# Altium PCB 光纖發射.PCBDOC
Units mm, origin at the board's own origin, x right, y up, seen from the top; angles counter-clockwise.
Board outline 152.4 x 101.6 mm, 2 copper layers (Top Layer, Bottom Layer); 21 components, 17 nets, 71 pads, 2 vias.
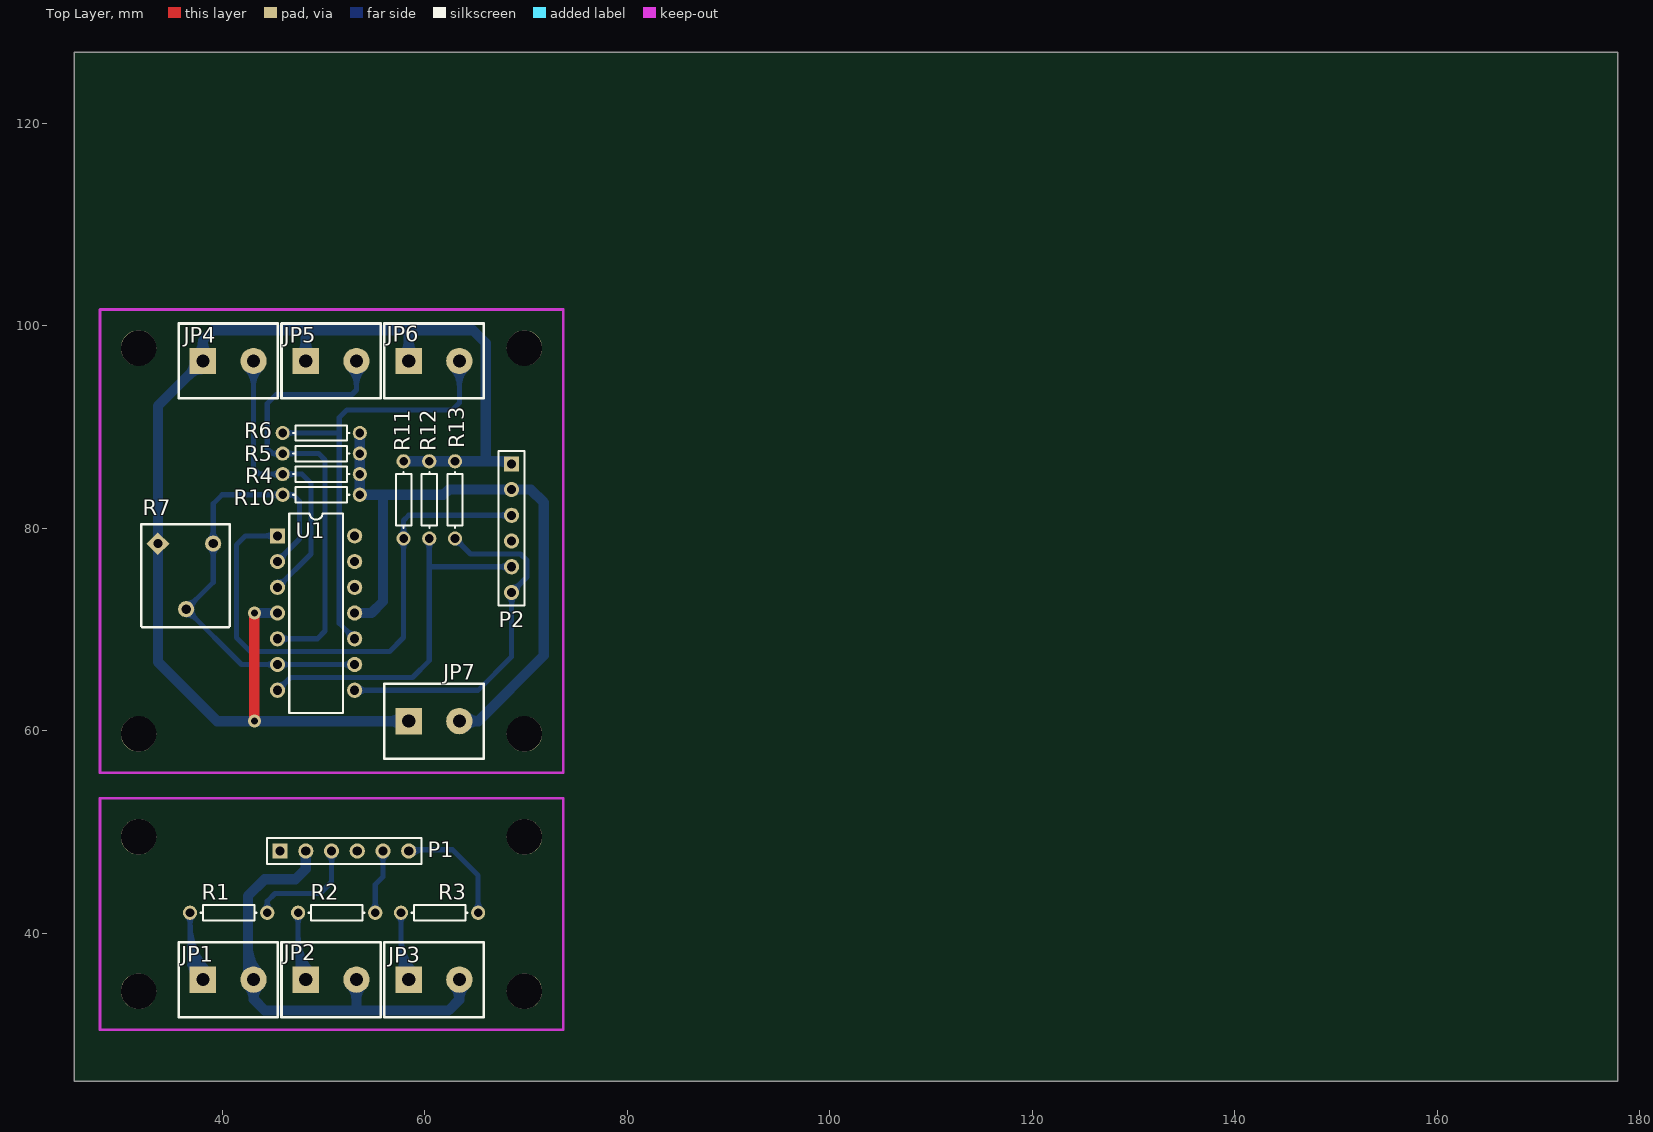
[diagram p0: Top Layer view]
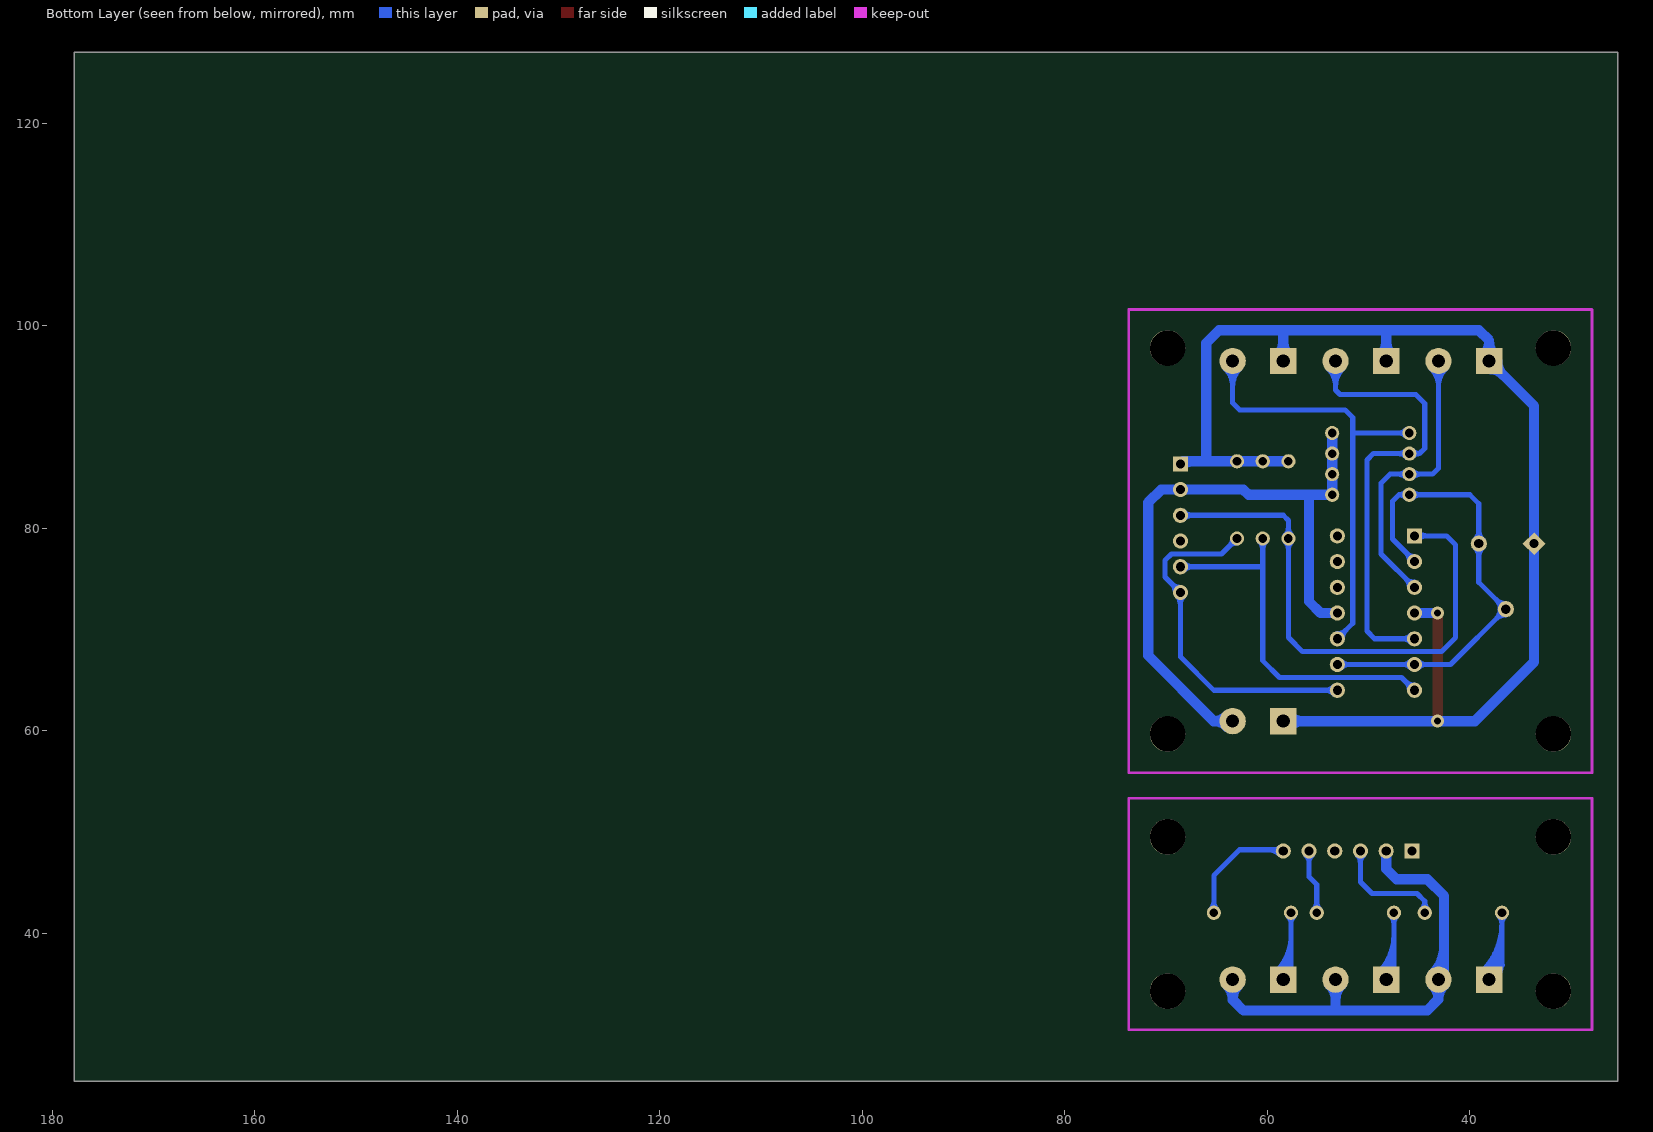
[diagram p1: Bottom Layer view, seen from below]

## Layer stack, top to bottom
Top Layer: signal copper 0.0356
Dielectric: dielectric 0.32, FR-4, Dk 4.8
Bottom Layer: signal copper 0.0356

## Board outline
25.4,25.4 177.8,25.4 177.8,127 25.4,127

## Design rules (kind name [scope] priority, off if disabled: settings)
Clearance [All] p1: gap=0.254
ComponentClearance [All] p1: gap=0.254 collisioncheckmode=0
HoleSize [All] p1: absolutevalues=TRUE maxlimit=3.81 minlimit=0.025 maxpercent=80.000 minpercent=20.000
PolygonConnect [All] p1: connectstyle=Relief reliefconductorwidth=0.254 reliefentries=4 polygonreliefangle="90 Angle"
RoutingVias [All] p1: holewidth=0.711 width=1.27 viastyle="Through Hole" minholewidth=0.711 minwidth=1.27 maxholewidth=0.711 maxwidth=1.27
SolderMaskExpansion [All] p1: expansion=0.102
TestPointUsage [All] p1: valid=0 allowmultiple=FALSE
Testpoint [All] p1: side=15 testpointundercomponent=TRUE minsize=1.016 maxsize=2.54 preferedsize=1.524 minholesize=0 maxholesize=1.016 preferedholesize=0.813 testpointgrid=0.025 style=1023 order=1234567890
Width power [InNetClass('power')] p1: maxlimit=1.016 minlimit=0.254 preferedwidth=1.016
Width [All] p2: maxlimit=1.016 minlimit=0.254 preferedwidth=0.508
16 further rules are at their usual default settings.

## Classes and differential pairs
net class power: +5 GND GND1 VCC

## Components (designator, comment, footprint, x,y, rotation, side; value= is the part's Value field where it differs from the comment)
JP1 "2pinºÝ¤l" 2PINºÝ¤l-1 38.1,35.433 r0 top
JP2 "2pinºÝ¤l" 2PINºÝ¤l-1 48.26,35.433 r0 top
JP3 "2pinºÝ¤l" 2PINºÝ¤l-1 58.42,35.433 r0 top
JP4 "2pinºÝ¤l" 2PINºÝ¤l-1 38.1,96.52 r0 top
JP5 "2pinºÝ¤l" 2PINºÝ¤l-1 48.26,96.52 r0 top
JP6 "2pinºÝ¤l" 2PINºÝ¤l-1 58.42,96.52 r0 top
JP7 "2pinºÝ¤l" 2PINºÝ¤l-1 58.42,60.96 r0 top
P1 "Header 6" HDR1X6 45.72,48.133 r0 top
P2 "Header 6" HDR1X6 68.58,86.36 r270 top
R1 "Res1" AXIAL-0.3 40.64,42.037 r0 top
R2 "Res1" AXIAL-0.3 51.308,42.037 r180 top
R3 "Res1" AXIAL-0.3 61.468,42.037 r180 top
R4 "Res1" AXIAL-0.3 49.784,85.344 r0 top
R5 "Res1" AXIAL-0.3 49.784,87.376 r0 top
R6 "Res1" AXIAL-0.3 49.784,89.408 r0 top
R7 "RPot" VR1 33.655,78.486 r0 top
R10 "Res1" AXIAL-0.3 49.784,83.312 r180 top
R11 "Res1" AXIAL-0.3 57.912,82.804 r90 top
R12 "Res1" AXIAL-0.3 60.452,82.804 r90 top
R13 "Res1" AXIAL-0.3 62.992,82.804 r90 top
U1 "LM324N" 646-06 49.276,71.628 r270 top

## Footprints (in the part's own frame and the unit in brackets; to place one, negate y for a bottom-side part, rotate by r counter-clockwise, add the part's x,y. Pads: shape width x height; smd on the part's side, far side on the other; paste and mask are expansions set on the pad)
2PINºÝ¤l-1 [mm]
  rect 2.6x2.6 hole 1.3: 1(0,0)
  round 2.6 hole 1.3: 2(5,0)
  silkscreen extent -2.4,-3.7 7.4,3.7
646-06 [mm] "DIP; 14 Leads; Row Spacing 7.62 mm; Pitch 2.54 mm"
  rect 1.5x1.5 hole 0.9: 1(-7.62,-3.81)
  round 1.5 hole 0.9: 2(-5.08,-3.81) 3(-2.54,-3.81) 4(0,-3.81) 5(2.54,-3.81) 6(5.08,-3.81) 7(7.62,-3.81) 8(7.62,3.81) 9(5.08,3.81) 10(2.54,3.81) 11(0,3.81) 12(-2.54,3.81) 13(-5.08,3.81) 14(-7.62,3.81)
  silkscreen extent -9.85,-2.65 9.85,2.65
AXIAL-0.3 [mm] "Resistor; 2 Leads"
  round 1.4 hole 0.85: 1(-3.81,0) 2(3.81,0)
  silkscreen extent -2.77,-0.76 2.77,0.76
HDR1X6 [mm] "Connector; Header; 6 Position"
  rect 1.5x1.5 hole 0.9: 1(0,0)
  round 1.5 hole 0.9: 2(2.54,0) 3(5.08,0) 4(7.62,0) 5(10.16,0) 6(12.7,0)
  silkscreen extent -1.27,-1.27 13.97,1.27
VR1 [mm]
  rect 1.6x1.6 hole 0.9 rot 45: 1(0,0)
  round 1.6 hole 0.9: 2(2.794,-6.477) 3(5.461,0)
  silkscreen extent -1.65,-8.25 7.11,1.91

## Part data
P1 P2: "Header, 6-Pin"
R1 R2 R3 R4 R5 R6 R10 R11 R12 R13: "Resistor"
R7: "Potentiometer"
U1: "Quad Low-Power Operational Amplifier"

## Free pads (board coordinates)
  round 3.5 hole 3.5: 0(31.75,34.29) 1(69.85,34.29) 2(69.85,49.53) 3(31.75,49.53) 4(69.85,59.69) 5(69.85,97.79) 6(31.75,97.79) 7(31.75,59.69)

## Via types
v1: diameter 1.27, hole 0.711, Top Layer to Bottom Layer, 2 vias

## Nets (pads, with @x,y where several pads share a name; then routed paths per layer and width w, separated by ;. In a path a pad name is that pad's centre, name@x,y a point inside that pad or via, vN(x,y) a via of type N, cw(c..) or ccw(c..) an arc to the next point about the centre after c; other vN are vias at no path point)
+5: JP4.1 JP5.1 JP6.1 JP7.1 P2.1 R7.1 R11.2 R12.2 R13.2 U1.4 | length 147.2
  Top Layer w1.016: v1(43.18,60.96) v1(43.18,71.628)
  Bottom Layer w1.016: JP4.1@37.308,96.52 cw(c35.396,96.52) 36.748,95.168 cw(c38.1,93.816) JP4.1@38.1,95.728 ; JP4.1@37.54,97.08 ccw(c36.188,98.432) 38.1,98.432 ccw(c40.012,98.432) JP4.1@38.66,97.08 ; v1(43.18,71.628) U1.4 ; JP5.1@47.7,97.08 ccw(c46.348,98.432) 48.26,98.432 ccw(c50.172,98.432) JP5.1@48.82,97.08 ; JP5.1 48.26,99.441 ; JP7.1@57.86,60.4 ccw(c56.508,59.048) 56.508,60.96 ccw(c56.508,62.872) JP7.1@57.86,61.52 ; JP6.1@57.86,97.08 ccw(c56.508,98.432) 58.42,98.432 ccw(c60.332,98.432) JP6.1@58.98,97.08 ; R11.2 68.326,86.614 P2.1 ; JP7.1 39.497,60.96 33.655,66.802 33.655,92.075 JP4.1 38.1,98.552 39.116,99.568 64.77,99.568 66.04,98.298 66.04,86.614 ; JP6.1 58.42,99.568 ; 67.383,86.614 cw(c67.383,85.163) P2.1@68.409,86.189
GND: JP1.2 JP2.2 JP3.2 P1.2 | length 57.6
  Bottom Layer w1.016: JP1.2@42.54,34.873 cw(c41.188,33.521) 43.1,33.521 cw(c45.012,33.521) JP1.2@43.66,34.873 ; 42.545,38.685 ccw(c46.352,38.685) JP1.2@43.66,35.993 ; P1.2@48.26,48.26 48.26,46.355 47.244,45.339 44.196,45.339 42.545,43.688 42.545,36.115 43.1,35.56 43.1,33.481 44.196,32.385 62.357,32.385 63.42,33.448 JP3.2@63.42,35.56 ; JP2.2@52.7,34.873 cw(c51.348,33.521) 53.26,33.521 cw(c55.172,33.521) JP2.2@53.82,34.873 ; 53.26,32.465 JP2.2@53.26,35.56 ; JP3.2@62.86,34.873 cw(c61.508,33.521) 63.42,33.521 cw(c65.332,33.521) JP3.2@63.98,34.873
GND1: JP7.2 P2.2 R4.2 R5.2 R6.2 R10.1 U1.11 | length 67.8
  Bottom Layer w1.016: U1.11 54.737,71.628 55.88,72.771 55.88,83.312 ; R6.2 R10.1 61.849,83.312 62.357,83.82 70.485,83.82 71.755,82.55 71.755,67.437 65.278,60.96 ; JP7.2 65.278,60.96 ; JP7.2@63.991,60.412 cw(c65.278,59.177) 65.278,60.96 ; JP7.2@63.991,61.508 ccw(c65.278,62.743) 65.278,60.96
IN: R7.2 R7.3 R10.2 U1.2 U1.6 U1.9 | length 65.4
  Bottom Layer w0.508: R7.2@36.449,71.463 cw(c36.449,70.145) 37.381,71.077 cw(c38.313,72.009) 36.995,72.009 cw(c38.313,72.009) 37.381,72.941 cw(c36.449,73.873) R7.2@36.449,72.555 ; R7.3@38.73,78.1 cw(c37.798,77.168) 39.116,77.168 cw(c40.434,77.168) R7.3@39.502,78.1 ; R7.3@38.73,78.872 ccw(c37.798,79.804) 39.116,79.804 ccw(c40.434,79.804) R7.3@39.502,78.872 ; U1.6@45.115,66.197 ccw(c44.269,65.351) 44.269,66.548 ccw(c44.269,67.745) U1.6@45.115,66.899 ; U1.2@45.466,76.77 47.625,78.929 47.625,82.677 46.99,83.312 ; U1.2@45.466,77.204 ccw(c45.466,78.253) 46.208,77.511 ; R10.2@45.659,82.997 ccw(c44.897,82.235) 44.897,83.312 ccw(c44.897,84.389) R10.2@45.659,83.627 ; U1.6@45.817,66.197 cw(c46.663,65.351) 46.663,66.548 cw(c46.663,67.745) U1.6@45.817,66.899 ; U1.2@45.962,76.708 cw(c47.308,76.708) 46.356,77.66 ; R10.2@46.302,83.01 cw(c46.99,82.378) 46.99,83.312 ; R10.2@46.302,83.614 ccw(c46.99,84.246) 46.99,83.312 ; U1.9@52.735,66.197 ccw(c51.889,65.351) 51.889,66.548 ccw(c51.889,67.745) U1.9@52.735,66.899 ; U1.9 41.91,66.548 R7.2 39.116,74.676 39.116,82.423 40.005,83.312 46.99,83.312
NetJP1_1: JP1.1 R1.1 | length 27.2
  Bottom Layer w0.508: R1.1@36.515,41.722 cw(c35.753,40.96) 36.83,40.96 cw(c37.907,40.96) R1.1@37.145,41.722 ; 36.83,37.345 ccw(c40.012,37.345) JP1.1@37.762,35.095 ; 36.83,38.571 ccw(c41.238,38.571) JP1.1@38.121,35.454 ; 36.83,39.798 ccw(c42.465,39.798) JP1.1@38.48,35.813 ; 36.83,41.024 ccw(c43.691,41.024) JP1.1@38.84,36.173 ; R1.1@36.83,42.164 36.83,36.83 JP1.1@38.1,35.56 ; JP1.1@37.089,35.7 ccw(c35.89,36.017) 36.767,36.893 ccw(c37.808,37.935) JP1.1@37.979,36.472
NetJP2_1: JP2.1 R2.2 | length 17.8
  Bottom Layer w0.508: R2.2@47.183,41.722 cw(c46.421,40.96) 47.498,40.96 cw(c48.575,40.96) R2.2@47.813,41.722 ; 47.498,37.345 ccw(c50.172,37.345) JP2.1@48.281,35.454 ; 47.498,38.571 ccw(c51.398,38.571) JP2.1@48.64,35.813 ; 47.498,39.798 ccw(c52.625,39.798) JP2.1@49,36.173 ; R2.2@47.498,42.164 47.498,36.322 JP2.1@48.26,35.56
NetJP3_1: JP3.1 R3.2 | length 17.8
  Bottom Layer w0.508: R3.2@57.343,41.722 cw(c56.581,40.96) 57.658,40.96 cw(c58.735,40.96) R3.2@57.973,41.722 ; 57.658,37.345 ccw(c60.332,37.345) JP3.1@58.441,35.454 ; 57.658,38.571 ccw(c61.558,38.571) JP3.1@58.8,35.813 ; 57.658,39.798 ccw(c62.785,39.798) JP3.1@59.16,36.173 ; R3.2@57.658,42.164 57.658,36.322 JP3.1@58.42,35.56
VCC: P1.1
X-CLK: P1.6 R3.1 | length 15
  Bottom Layer w0.508: P1.6@58.42,48.26 62.738,48.26 65.278,45.72 R3.1@65.278,42.164 ; P1.6@58.771,47.782 cw(c59.924,46.629) 59.924,48.26 ; P1.6@58.771,48.484 ccw(c59.311,49.024) 59.311,48.26 ; R3.1@64.963,42.352 ccw(c64.201,43.114) 65.278,43.114 ccw(c66.355,43.114) R3.1@65.593,42.352
X-CLK-IN: JP6.2 R6.1 U1.10 | length 52.2
  Bottom Layer w0.508: R6.1 51.562,89.408 ; R6.1@46.289,89.093 cw(c47.051,88.331) 47.051,89.408 cw(c47.051,90.485) R6.1@46.289,89.723 ; U1.10@52.59,69.088 ccw(c51.393,69.088) 52.239,69.935 ccw(c53.086,70.781) U1.10@53.086,69.584 ; U1.10 51.562,70.612 51.562,90.932 52.324,91.694 62.738,91.694 63.42,92.376 JP6.2 ; JP6.2@62.68,95.78 cw(c60.895,93.995) 63.42,93.995 cw(c65.945,93.995) JP6.2@64.16,95.78
X-CLK-OUT: P2.6 R13.1 U1.8 | length 42.4
  Bottom Layer w0.508: U1.8 65.278,64.008 68.58,67.31 P2.6 70.104,75.184 70.104,76.835 69.469,77.47 64.516,77.47 R13.1 ; U1.8@53.437,63.657 cw(c54.283,62.811) 54.283,64.008 cw(c54.283,65.205) U1.8@53.437,64.359 ; R13.1@62.992,78.548 cw(c62.992,77.471) 63.753,78.233 cw(c64.515,78.994) R13.1@63.438,78.994 ; P2.6@68.229,73.309 cw(c67.383,72.463) 68.58,72.463 cw(c69.777,72.463) P2.6@68.931,73.309 ; P2.6@68.58,74.156 ccw(c68.58,75.353) 69.427,74.507 ccw(c70.273,73.66) P2.6@69.076,73.66
X-CW: P1.5 R2.1 | length 10
  Bottom Layer w0.508: R2.1@54.803,42.352 ccw(c54.041,43.114) 55.118,43.114 ccw(c56.195,43.114) R2.1@55.433,42.352 ; R2.1@55.118,42.164 55.118,44.831 55.88,45.593 P1.5@55.88,48.26 ; P1.5@55.529,47.782 cw(c54.683,46.936) 55.88,46.936 cw(c57.077,46.936) P1.5@56.231,47.782
X-CW-IN: JP5.2 R5.1 U1.5 | length 53.9
  Bottom Layer w0.508: U1.5 49.403,69.088 50.165,69.85 50.165,86.741 49.53,87.376 44.958,87.376 ; R5.1@45.646,87.074 ccw(c44.958,86.442) 44.958,87.376 ; R5.1@45.646,87.678 cw(c44.958,88.31) 44.958,87.376 ; U1.5@45.817,68.737 cw(c46.663,67.891) 46.663,69.088 cw(c46.663,70.285) U1.5@45.817,69.439 ; R5.1@46.289,87.061 cw(c47.051,86.299) 47.051,87.376 cw(c47.051,88.453) R5.1@46.289,87.691 ; JP5.2@52.52,95.78 cw(c50.735,93.995) 53.26,93.995 cw(c55.785,93.995) JP5.2@54,95.78 ; JP5.2 53.26,93.646 52.832,93.218 45.339,93.218 44.45,92.329 44.45,87.884 44.958,87.376
X-CW-OUT: P2.5 R12.1 U1.7 | length 41.8
  Bottom Layer w0.508: U1.7 46.736,65.278 58.801,65.278 60.452,66.929 R12.1 ; U1.7@45.466,64.504 ccw(c45.466,65.701) 46.313,64.855 ccw(c47.159,64.008) U1.7@45.962,64.008 ; R12.1@60.137,78.679 cw(c59.375,77.917) 60.452,77.917 cw(c61.529,77.917) R12.1@60.767,78.679 ; 60.452,76.2 P2.5 ; P2.5@68.229,75.849 ccw(c67.383,75.003) 67.383,76.2 ccw(c67.383,77.397) P2.5@68.229,76.551
X-EN: P1.3 R1.2 | length 14.9
  Bottom Layer w0.508: R1.2@44.135,42.352 ccw(c43.373,43.114) 44.45,43.114 ccw(c45.527,43.114) R1.2@44.765,42.352 ; R1.2@44.45,42.164 44.45,43.18 45.212,43.942 49.657,43.942 50.8,45.085 P1.3@50.8,48.26 ; P1.3@50.449,47.782 cw(c49.603,46.936) 50.8,46.936 cw(c51.997,46.936) P1.3@51.151,47.782
X-EN-IN: JP4.2 R4.1 U1.3 | length 37.8
  Bottom Layer w0.508: JP4.2@42.36,95.78 cw(c40.575,93.995) 43.1,93.995 cw(c45.625,93.995) JP4.2@43.84,95.78 ; JP4.2 43.1,85.932 43.688,85.344 47.879,85.344 48.768,84.455 48.768,77.47 U1.3 ; U1.3@45.466,74.664 ccw(c45.466,75.861) 46.313,75.015 ccw(c47.159,74.168) U1.3@45.962,74.168 ; R4.1@45.659,85.029 ccw(c44.897,84.267) 44.897,85.344 ccw(c44.897,86.421) R4.1@45.659,85.659 ; R4.1@46.289,85.029 cw(c47.051,84.267) 47.051,85.344 cw(c47.051,86.421) R4.1@46.289,85.659
X-EN-OUT: P2.3 R11.1 U1.1 | length 60.8
  Bottom Layer w0.508: U1.1@45.115,78.897 ccw(c44.269,78.051) 44.269,79.248 ccw(c44.269,80.445) U1.1@45.115,79.599 ; U1.1@45.404,79.248 42.291,79.248 41.402,78.359 41.402,69.215 42.799,67.818 56.515,67.818 57.912,69.215 57.912,80.772 58.42,81.28 P2.3 ; R11.1@57.597,78.679 cw(c56.835,77.917) 57.912,77.917 cw(c58.989,77.917) R11.1@58.227,78.679 ; R11.1@57.597,79.309 ccw(c56.835,80.071) 57.912,80.071 ccw(c58.989,80.071) R11.1@58.227,79.309 ; P2.3@68.229,80.929 ccw(c67.383,80.083) 67.383,81.28 ccw(c67.383,82.477) P2.3@68.229,81.631
pads on no net: P1.4 P2.4 U1.12 U1.13 U1.14

## Keep-outs
Keep-Out Layer:
  lines w0.254: 27.94,30.48 27.94,53.34 73.66,53.34 73.66,30.48 27.94,30.48 ; 27.94,55.88 73.66,55.88 73.66,101.6 27.94,101.6 27.94,55.88